# Altium PCB MB1814.PcbDoc (part 3 of 6)
Units mm, origin at the board's own origin, x right, y up, seen from the top; angles counter-clockwise.
Board outline 70 x 82.5 mm, 4 copper layers (Top Layer, Signal Layer 1, Signal Layer 2, Bottom Layer), stack 1.614 mm thick; 207 components, 155 nets, 901 pads, 710 vias.
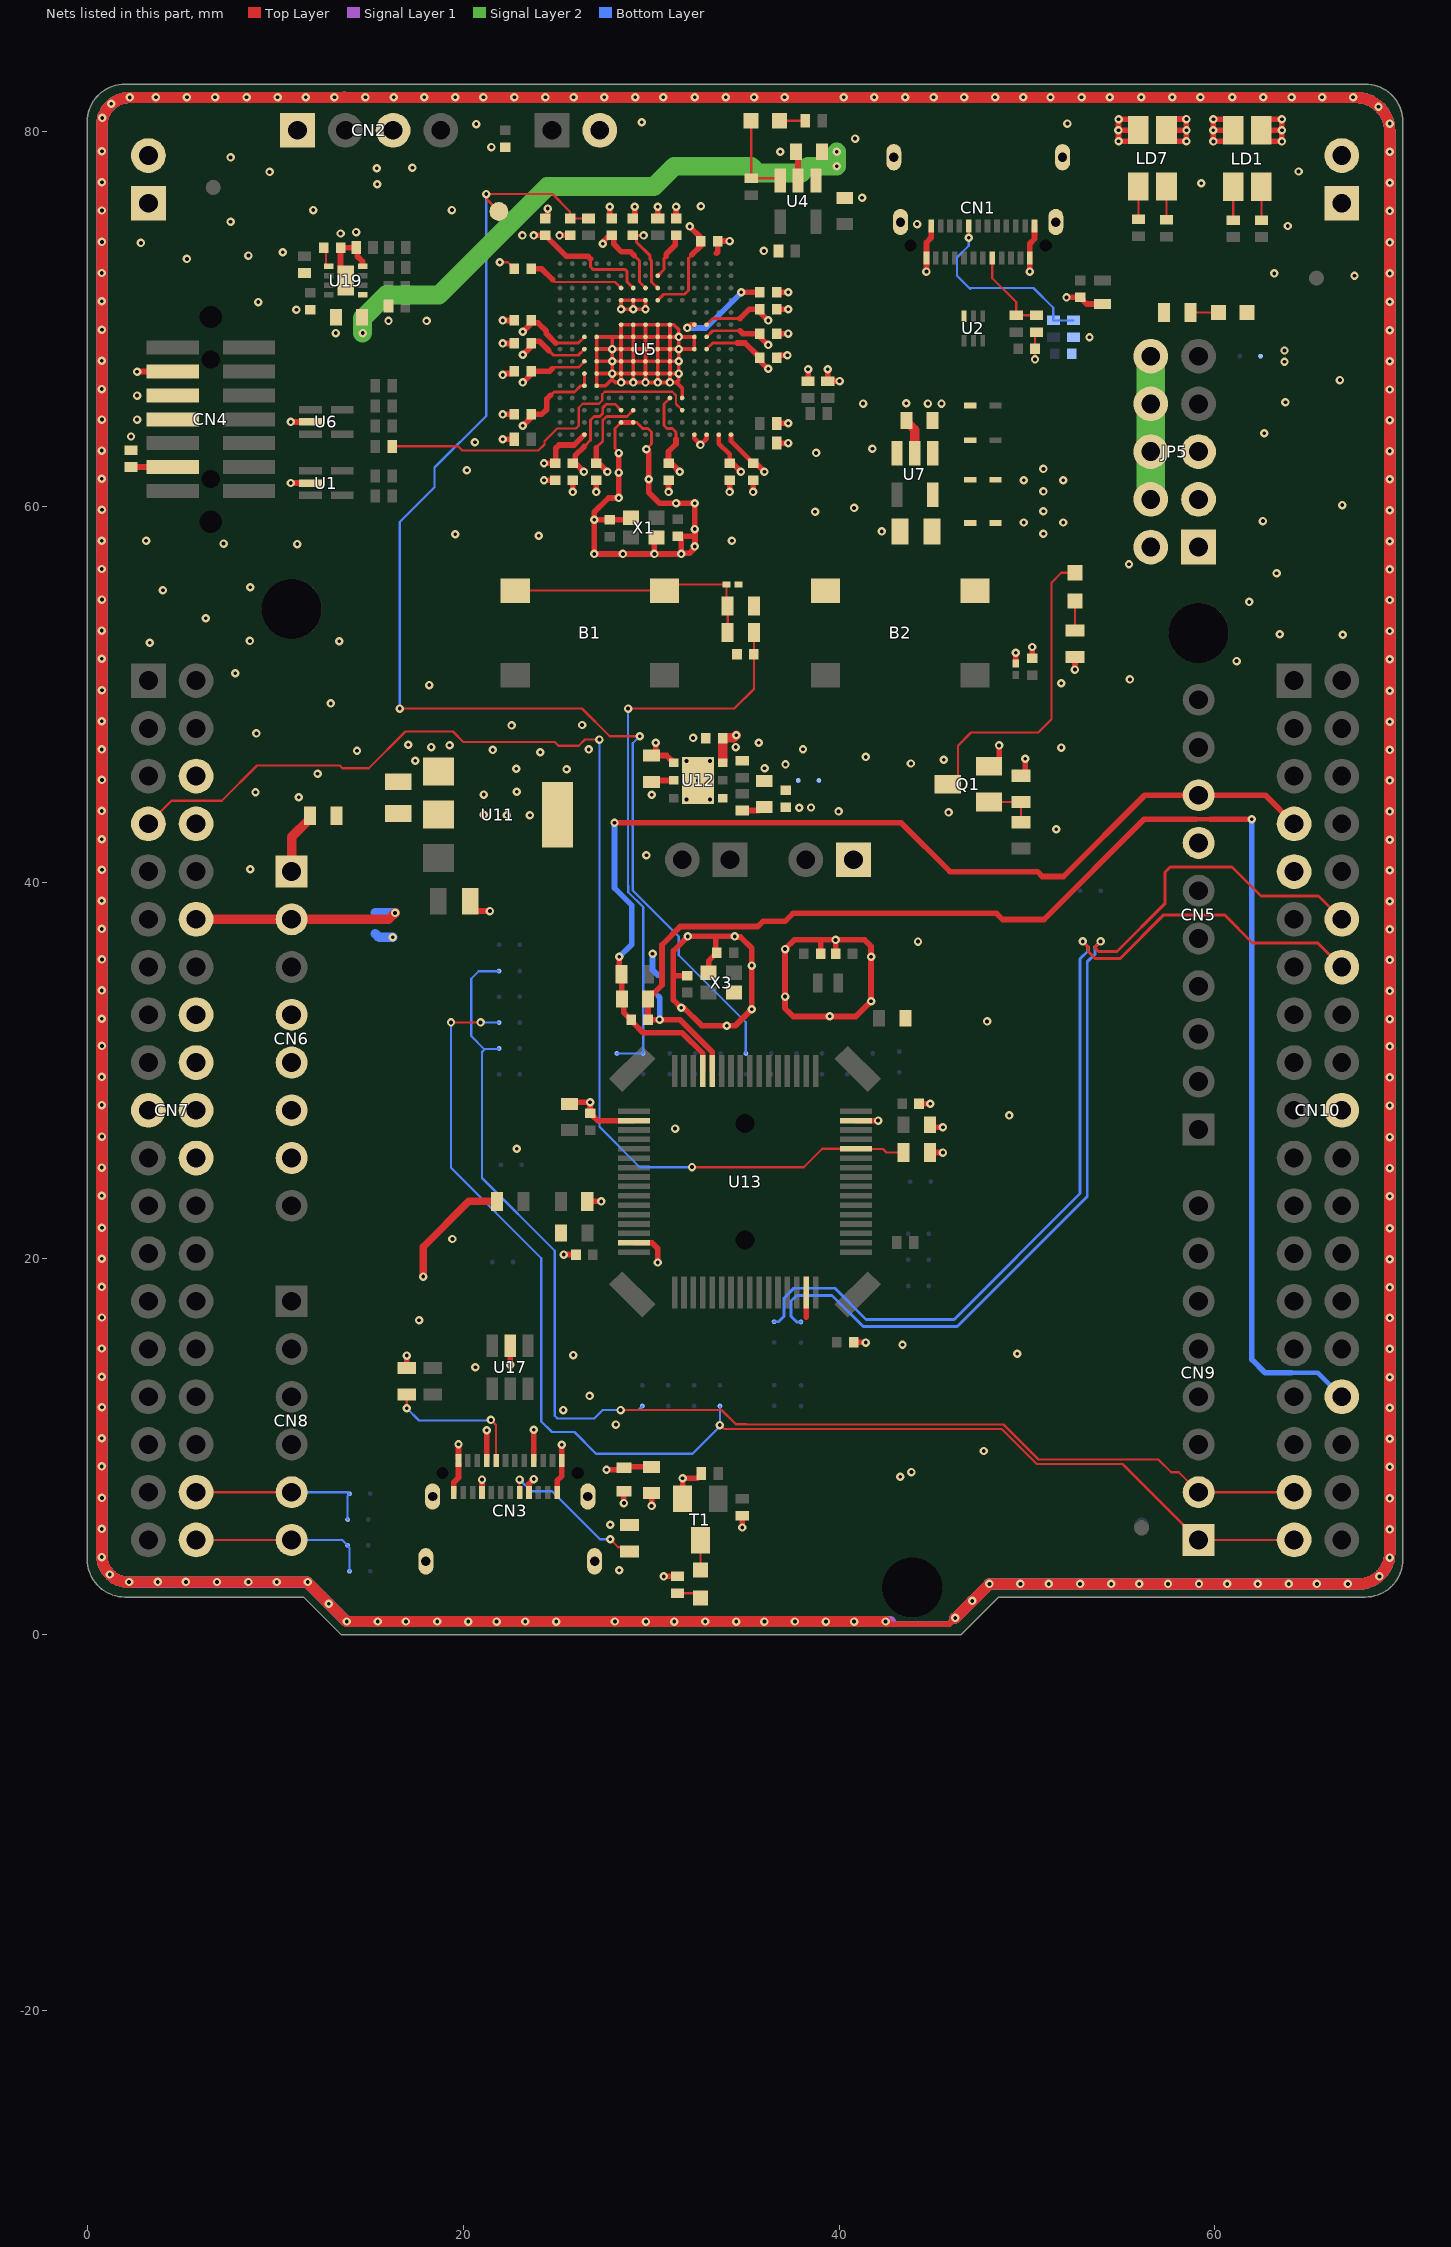
[diagram p4: the nets of this part, all layers, seen from the top]

## Part data (continued)
R2 R24: library part MCD-00062, "Resistor, 330R, 0402, +/-1%, 1/16W", Manufacturer=YAGEO, Manufacturer_Part_Number=RC0402FR-07330RL, Package=0402, Component_Country_Of_Origin=China, ComponentLink1URL=http://tunmcdsvn.tun.st.com/Component_Documentation_Library/Trunk/Resistor/YAGEO_RC_L_Series, Internal_Part_Number=MCD-00062, Order_Code_Digikey=311-330LRCT-ND, Order_Code_Farnell=9239170, Order_Code_RS=N/A, Part_Preference=Recommended, Part_Type=Resistor, Status=Released
R3 R23: library part MCD-02665, "Resistor, 1K, 0402, +/-0.1%, 1/16W, +/-25ppm/°C", Manufacturer=YAGEO, Manufacturer_Part_Number=RT0402BRD071KL, Package=0402, ComponentLink1URL=http://tunmcdsvn.tun.st.com/Component_Documentation_Library/Trunk/Resistor/YAGEO_RT_Series, Internal_Part_Number=MCD-02665, Order_Code_Digikey=YAG1386TR-ND, Order_Code_Farnell=3496475, Order_Code_RS=199-1298, Part_Preference=Recommended, Part_Type=Resistor, Status=Checked
R4 R15: library part MCD-00119, "Resistor, 100R, 0402, +/-1%, 1/16W", Manufacturer=YAGEO, Manufacturer_Part_Number=RC0402FR-07100RL, Package=0402, Component_Country_Of_Origin=China, ComponentLink1URL=http://tunmcdsvn.tun.st.com/Component_Documentation_Library/Trunk/Resistor/YAGEO_RC_L_Series, Internal_Part_Number=MCD-00119, Order_Code_Digikey=311-100LRCT-ND, Order_Code_Farnell=9239111, Order_Code_RS=N/A, Part_Preference="Not recommended", Part_Type=Resistor, Status=Checked
  R4: ID=2748, ShowFields=YES
R5: library part MCD-00185, "Resistor,3K,0402,1%,1/16W", Manufacturer=YAGEO, Manufacturer_Part_Number=RC0402FR-073KL, Package=R0402, ComponentLink1Description=Datasheet, ComponentLink1URL=http://tunmcdsvn.tun.st.com/Component_Datasheet_Library/Trunk/Resistors/Yageo_Resistor_RC0402-series, Internal_Part_Number=MCD-00185, Part_Type=Resistor, Provided_By=SUBCO, Status=Released
R6 R54: library part MCD-00059, "Resistor,100K,0402,1%,1/16W", Alternate_Manufacturer=YAGEO, Alternate_Manufacturer_Part_Number=RT0402FRE07100KL, Manufacturer_Part_Number=RC0402FR-07100KL, Package=R0402, ComponentLink1Description=Datasheet, ComponentLink1URL=http://tunmcdsvn.tun.st.com/Component_Datasheet_Library/Trunk/Resistors/Yageo_Resistor_RC0402-series, Initial_Board_Reference=MB1274, Internal_Part_Number=MCD-00059, Item Type=Item, Manufacturer=YAGEO, Part_Type=Resistor, Path=ws/MCD_ApplicationBoards/Lists/MCDPARTSdatabase, Provided_By=SUBCO, Status=Released
R7 R25: library part MCD-00225, "Resistor,510R,0603,1%,1/10W", Manufacturer=YAGEO, Manufacturer_Part_Number=RC0603FR-07510RL, Package=R0603, ComponentLink1Description=Datasheet, ComponentLink1URL=http://tunmcdsvn.tun.st.com/Component_Datasheet_Library/Trunk/Resistors/Yageo_Resistor_RC0603-series, ECCN_EU=NEC, ECCN_US=EAR99, Internal_Part_Number=MCD-00225, Part_Type=Resistor, Provided_By=SUBCO, Status=Released
R8 R10 R41: library part MCD-00053, "Resistor,10K,0402,1%,1/16W", Manufacturer=YAGEO, Manufacturer_Part_Number=RC0402FR-0710KL, Package=R0402, ComponentLink1Description=Datasheet, ComponentLink1URL=http://tunmcdsvn.tun.st.com/Component_Datasheet_Library/Trunk/Resistors/Yageo_Resistor_RC0402-series, Internal_Part_Number=MCD-00053, Part_Type=Resistor, Provided_By=SUBCO, Status=Released
  R8: Initial_Board_Reference=MB1274, Item Type=Item, Path=ws/MCD_ApplicationBoards/Lists/MCDPARTSdatabase
  R41: ECCN_EU=NEC, ECCN_US=EAR99
R9 R11 R17 R18: library part MCD-00333, "Resistor, 5K1, 0402, +/-1%, 1/16W", Alternate_Manufacturer=N/A, Manufacturer=YAGEO, Manufacturer_Part_Number=RC0402FR-075K1L, Package=0402, Alternate_Manufacturer_Part_Number=N/A, ComponentLink1URL=http://tunmcdsvn.tun.st.com/Component_Documentation_Library/Trunk/Resistor/YAGEO_RC_L_Series, Internal_Part_Number=MCD-00333, Order_Code_Digikey=311-5.10KLRCT-ND, Order_Code_Farnell=1458805, Order_Code_RS=N/A, Part_Preference=Recommended, Part_Type=Resistor, Status=Released
R12 R16 R19: library part MCD-00053, "Resistor, 10K, 0402, +/-1%, 1/16W", Manufacturer=YAGEO, Manufacturer_Part_Number=RC0402FR-0710KL, Package=0402, BMS_Part_Number=9131590, Component_Country_Of_Origin=China, ComponentLink1URL=http://tunmcdsvn.tun.st.com/Component_Documentation_Library/Trunk/Resistor/YAGEO_RC_L_Series, ID=2539, Internal_Part_Number=MCD-00053, Order_Code_Digikey=311-10.0KLRCT-ND, Order_Code_Farnell=9239359, Order_Code_RS=N/A, Part_Preference=Recommended, Part_Type=Resistor, ShowFields=YES, Status=Released
R13 R14: library part MCD-00059, "Resistor, 100K, 0402, +/-1%, 1/16W", Manufacturer=YAGEO, Manufacturer_Part_Number=RC0402FR-07100KL, Package=0402, Component_Country_Of_Origin=China, ComponentLink1URL=http://tunmcdsvn.tun.st.com/Component_Documentation_Library/Trunk/Resistor/YAGEO_RC_L_Series, ID=2533, Internal_Part_Number=MCD-00059, Order_Code_Digikey=311-100KLRTR-ND, Order_Code_Farnell=2421891, Order_Code_RS=N/A, Part_Preference=Recommended, Part_Type=Resistor, ShowFields=YES, Status=Released
R20: library part MCD-00409, "Resistor, 1K8, 0402, +/-1%, 1/16W", Manufacturer=YAGEO, Manufacturer_Part_Number=RC0402FR-071K8L, Package=0402, Component_Country_Of_Origin=China, ComponentLink1URL=http://tunmcdsvn.tun.st.com/Component_Documentation_Library/Trunk/Resistor/YAGEO_RC_L_Series, Internal_Part_Number=MCD-00409, Order_Code_Digikey=311-1.80KLRCT-ND, Order_Code_Farnell=9239260, Order_Code_RS=N/A, Part_Preference=Recommended, Part_Type=Resistor, Status=Released
R21: library part MCD-00381, "Resistor, 1K3, 0402, +/-1%, 1/16W", Manufacturer=YAGEO, Manufacturer_Part_Number=RC0402FR-071K3L, Package=0402, Component_Country_Of_Origin=China, ComponentLink1URL=http://tunmcdsvn.tun.st.com/Component_Documentation_Library/Trunk/Resistor/YAGEO_RC_L_Series, ID=2898, Internal_Part_Number=MCD-00381, Order_Code_Digikey=YAG3036CT-ND, Order_Code_Farnell=1799176, Order_Code_RS=N/A, Part_Preference=Recommended, Part_Type=Resistor, ShowFields=YES, Status=Released
R22: library part MCD-02455, "Resistor, 3K9, 0402, +/-1%, 1/16W, +/-100ppm/°C", Manufacturer=YAGEO, Manufacturer_Part_Number=RC0402FR-073K9L, Package=0402, Component_Country_Of_Origin=China, ComponentLink1URL=http://tunmcdsvn.tun.st.com/Component_Documentation_Library/Trunk/Resistor/YAGEO_RC0402_Series, ID=4561, Internal_Part_Number=MCD-02455, Order_Code_Digikey=311-3.90KLRTR-ND, Order_Code_Farnell=9239308, Order_Code_RS=198-7783, Part_Preference=Recommended, Part_Type=Resistor, ShowFields=YES, Status=Released
R26 R28: library part MCD-00223, "Resistor,100K,0603,1%,1/10W", Manufacturer=YAGEO, Manufacturer_Part_Number=RC0603FR-07100KL, Package=R0603, ComponentLink1Description=Yageo_Resistor_RC0603-series.pdf, ComponentLink1URL=http://tunmcdsvn.tun.st.com/Component_Datasheet_Library/Trunk/Resistors/Yageo_Resistor_RC0603-series, ECCN_EU=n/a, ECCN_US=n/a, Initial_Board_Reference=MB1319, Internal_Part_Number=MCD-00223, Part_Type=Resistor, Provided_By=Subcon, Status=Released
R27: library part MCD-00197, "Resistor,330R,0603,1%,1/10W", Manufacturer=YAGEO, Manufacturer_Part_Number=RC0603FR-07330RL, Package=R0603, ComponentLink1Description=Yageo_Resistor_RC0603-series.pdf, ComponentLink1URL=http://tunmcdsvn.tun.st.com/Component_Datasheet_Library/Trunk/Resistors/Yageo_Resistor_RC0603-series, ECCN_EU=n/a, ECCN_US=n/a, Internal_Part_Number=MCD-00197, Part_Type=Resistor, Provided_By=Subcon, Status=Released
R29: library part MCD-00222, "Resistor,47K,0603,1%,1/10W", Manufacturer=YAGEO, Manufacturer_Part_Number=RC0603FR-0747KL, Package=R0603, ComponentLink1Description=Datasheet, ComponentLink1URL=http://tunmcdsvn.tun.st.com/Component_Datasheet_Library/Trunk/Resistors/Yageo_Resistor_RC0603-series, ECCN_EU=NEC, ECCN_US=EAR99, Internal_Part_Number=MCD-00222, Part_Type=Resistor, Provided_By=SUBCO, Status=Released
R30: library part MCD-00070, "Resistor,1K,0603,1%,1/10W", Manufacturer=YAGEO, Manufacturer_Part_Number=RC0603FR-071KL, Package=R0603, ComponentLink1Description=Yageo_Resistor_RC0603-series.pdf, ComponentLink1URL=http://tunmcdsvn.tun.st.com/Component_Datasheet_Library/Trunk/Resistors/Yageo_Resistor_RC0603-series, ECCN_EU=n/a, ECCN_US=n/a, Initial_Board_Reference=MB1274, Internal_Part_Number=MCD-00070, Part_Type=Resistor, Provided_By=Subcon, Status=Released
R31: library part MCD-00220, "Resistor,10K,0603,1%,1/10W", Manufacturer=YAGEO, Manufacturer_Part_Number=RC0603FR-0710KL, Package=R0603, ComponentLink1Description=Yageo_Resistor_RC0603-series.pdf, ComponentLink1URL=http://tunmcdsvn.tun.st.com/Component_Datasheet_Library/Trunk/Resistors/Yageo_Resistor_RC0603-series, ECCN_EU=n/a, ECCN_US=n/a, Initial_Board_Reference=MB1319, Internal_Part_Number=MCD-00220, Part_Type=Resistor, Provided_By=Subcon, Status=Released
R32: library part MCD-00481, "Resistor,47R,0402,1%,1/16W", Manufacturer=YAGEO, Manufacturer_Part_Number=RC0402FR-0747RL, Package=R0402, ComponentLink1Description=Datasheet, ComponentLink1URL=http://tunmcdsvn.tun.st.com/Component_Datasheet_Library/Trunk/Resistors/Yageo_Resistor_RC0402-series, ECCN_EU=NEC, ECCN_US=EAR99, Internal_Part_Number=MCD-00481, Part_Type=Resistor, Provided_By=SUBCO, Status=Released
R33: library part MCD-00056, "Resistor, 0R, 0603, +/-5%, 1/10W", Alternate_Manufacturer=N/A, Manufacturer=YAGEO, Manufacturer_Part_Number=RC0603JR-070RL, Package=0603, Alternate_Manufacturer_Part_Number=N/A, ComponentLink1URL=http://tunmcdsvn.tun.st.com/Component_Documentation_Library/Trunk/Resistor/YAGEO_RC_L_Series, Internal_Part_Number=MCD-00056, Order_Code_Digikey=311-0.0GRCT-ND, Order_Code_Farnell=9233130RL, Order_Code_RS=N/A, Part_Preference=Recommended, Part_Type=Resistor, Status=Released
R34: library part MCD-00217, "Resistor, 1K5, 0603, +/-1%, 1/10W", Manufacturer=YAGEO, Manufacturer_Part_Number=RC0603FR-071K5L, Package=0603, BMS_Part_Number=9129766, Component_Country_Of_Origin=China, ComponentLink1URL=http://tunmcdsvn.tun.st.com/Component_Documentation_Library/Trunk/Resistor/YAGEO_RC_L_Series, ID=2651, Internal_Part_Number=MCD-00217, Order_Code_Digikey=311-1.50KHRCT-ND, Order_Code_Farnell=9238506, Order_Code_RS=N/A, Part_Preference=Recommended, Part_Type=Resistor, ShowFields=YES, Status=Released
R35 R43: library part MCD-00334, "Resistor, 5K1, 0603, +/-1%, 1/10W", Alternate_Manufacturer=N/A, Manufacturer=YAGEO, Manufacturer_Part_Number=RC0603FR-075K1L, Package=0603, Alternate_Manufacturer_Part_Number=N/A, ComponentLink1URL=http://tunmcdsvn.tun.st.com/Component_Documentation_Library/Trunk/Resistor/YAGEO_RC_L_Series, Internal_Part_Number=MCD-00334, Order_Code_Digikey=311-5.10KHRCT-ND, Order_Code_Farnell=1799348, Order_Code_RS=N/A, Part_Preference=Recommended, Part_Type=Resistor, Status=Released
R37: library part MCD-00480, "Resistor, 430K, 0603, +/-1%, 1/10W", Manufacturer=YAGEO, Manufacturer_Part_Number=RC0603FR-07430KL, Package=0603, Component_Country_Of_Origin=China, ComponentLink1URL=http://tunmcdsvn.tun.st.com/Component_Documentation_Library/Trunk/Resistor/YAGEO_RC_L_Series, ID=2798, Internal_Part_Number=MCD-00480, Order_Code_Digikey=311-430KHRCT-ND, Order_Code_Farnell=N/A, Order_Code_RS=N/A, Part_Preference=Recommended, Part_Type=Resistor, ShowFields=YES, Status=Released
R38: library part MCD-00441, "Resistor,270R,0402,1%,1/16W", Manufacturer=YAGEO, Manufacturer_Part_Number=RC0402FR-07270RL, Package=R0402, ComponentLink1Description=Datasheet, ComponentLink1URL=http://tunmcdsvn.tun.st.com/Component_Datasheet_Library/Trunk/Resistors/Yageo_Resistor_RC0402-series, ECCN_EU=NEC, ECCN_US=EAR99, Internal_Part_Number=MCD-00441, Part_Type=Resistor, Provided_By=SUBCO, Status=Released
R39: library part MCD-00063, "Resistor,47K,0402,1%,1/16W", Manufacturer=YAGEO, Manufacturer_Part_Number=RC0402FR-0747KL, Package=R0402, ComponentLink1Description=Datasheet, ComponentLink1URL=http://tunmcdsvn.tun.st.com/Component_Datasheet_Library/Trunk/Resistors/Yageo_Resistor_RC0402-series, ECCN_EU=NEC, ECCN_US=EAR99, Internal_Part_Number=MCD-00063, Part_Type=Resistor, Provided_By=SUBCO, Status=Released
R40: library part MCD-00506, "Resistor, 620K, 0603, +/-1%, 1/10W", Manufacturer=YAGEO, Manufacturer_Part_Number=RC0603FR-07620KL, Package=0603, Component_Country_Of_Origin=China, ComponentLink1URL=http://tunmcdsvn.tun.st.com/Component_Documentation_Library/Trunk/Resistor/YAGEO_RC_L_Series, ID=3237, Internal_Part_Number=MCD-00506, Order_Code_Digikey=311-620KHRCT-ND, Order_Code_Farnell=N/A, Order_Code_RS=N/A, Part_Preference=Recommended, Part_Type=Resistor, ShowFields=YES, Status=Released
R44 R45 R47 R49: library part MCD-00455, "Resistor, 33R, 0402, +/-1%, 1/16W", Manufacturer=YAGEO, Manufacturer_Part_Number=RC0402FR-0733RL, Package=0402, Component_Country_Of_Origin=China, ComponentLink1URL=http://tunmcdsvn.tun.st.com/Component_Documentation_Library/Trunk/Resistor/YAGEO_RC_L_Series, ID=2821, Internal_Part_Number=MCD-00455, Order_Code_Digikey=311-33.0LRCT-ND, Order_Code_Farnell=9239057, Order_Code_RS=N/A, Part_Preference=Recommended, Part_Type=Resistor, ShowFields=YES, Status=Released
R46 R48 R50: library part MCD-00052, "Resistor, 0R, 0402, +/-5%, 1/16W", Manufacturer=YAGEO, Manufacturer_Part_Number=RC0402JR-070RL, Package=0402, Component_Country_Of_Origin=China, ComponentLink1URL=http://tunmcdsvn.tun.st.com/Component_Documentation_Library/Trunk/Resistor/YAGEO_RC_L_Series, Internal_Part_Number=MCD-00052, Order_Code_Digikey=311-0.0JRCT-ND, Order_Code_Farnell=9232516RL, Order_Code_RS=618-5804, Part_Preference=Recommended, Part_Type=Resistor, Status=Released
  R46 R48: ID=2540, ShowFields=YES
R51: library part MCD-00185, "Resistor, 3K, 0402, +/-1%, 1/16W", Manufacturer=YAGEO, Manufacturer_Part_Number=RC0402FR-073KL, Package=0402, Component_Country_Of_Origin=China, ComponentLink1URL=http://tunmcdsvn.tun.st.com/Component_Documentation_Library/Trunk/Resistor/YAGEO_RC_L_Series, Internal_Part_Number=MCD-00185, Order_Code_Digikey=311-3KLRCT-ND, Order_Code_Farnell=1458777, Order_Code_RS=N/A, Part_Preference=Recommended, Part_Type=Resistor, Status=Released
R52: library part MCD-00063, "Resistor, 47K, 0402, +/-1%, 1/16W", Manufacturer=YAGEO, Manufacturer_Part_Number=RC0402FR-0747KL, Package=0402, Component_Country_Of_Origin=China, ComponentLink1URL=http://tunmcdsvn.tun.st.com/Component_Documentation_Library/Trunk/Resistor/YAGEO_RC_L_Series, ID=2528, Internal_Part_Number=MCD-00063, Order_Code_Digikey=311-47.0KLRCT-ND, Order_Code_Farnell=9239430, Order_Code_RS=N/A, Part_Preference=Recommended, Part_Type=Resistor, ShowFields=YES, Status=Released
R53: library part MCD-01943, "Resistor, 15K, 0402, +/-1%, 1/16W", Manufacturer=YAGEO, Manufacturer_Part_Number=RC0402FR-0715KL, Package=0402, Component_Country_Of_Origin=China, ComponentLink1URL=http://tunmcdsvn.tun.st.com/Component_Documentation_Library/Trunk/Resistor/YAGEO_RC_L_Series, ID=4043, Internal_Part_Number=MCD-01943, Order_Code_Digikey=311-15.0KLRCT-ND, Order_Code_Farnell=2146237, Order_Code_RS=618-6009, Part_Preference=Recommended, Part_Type=Resistor, ShowFields=YES, Status=Released
SB1 SB2 SB3 SB5 SB6 SB7 SB9 SB11 SB12 SB13 SB15 SB16 SB17 SB18 SB19 SB20 SB21 SB22 SB23 SB24 SB25 SB26 SB27 SB28 SB29 SB30 SB31 SB32 SB33 SB34 SB35 SB36 SB37 SB38 SB39 SB40 SB41 SB42 SB43 SB44 SB45: library part MCD-00071, "Solder Bridge ON", Manufacturer=YAGEO, Manufacturer_Part_Number=RC0603JR-070RL, Package=SB0603, ComponentLink1Description=Datasheet, ComponentLink1URL=http://tunmcdsvn.tun.st.com/Component_Datasheet_Library/Trunk/Resistors/Yageo_Resistor_RC0603-series, ECCN_EU=n/a, ECCN_US=n/a, Internal_Part_Number=MCD-00071, Part_Type=Mechanical, Provided_By=SUBCO, Status=Released
T1: library part MCD-00073, "NPN Bipolar Transistor", Alternate_Manufacturer="ON SEMICONDUCTOR", Alternate_Manufacturer_Part_Number="MMBT2222ALT1G / MMBT2222ALT3G", Manufacturer_Part_Number=BSR14, ComponentLink1Description=Datasheet, ComponentLink1URL=http://tunmcdsvn.tun.st.com/Component_Datasheet_Library/Trunk/IC/NXP_Transistor_BSR14, ECCN_EU=NEC, ECCN_US=EAR99, Internal_Part_Number=MCD-00073, Manufacturer="ON SEMICONDUCTOR", Part_Type=IC, Provided_By=SUBCO, Status=Released
TP13: library part MCD-00074, "Test Point 1mm", Manufacturer=n/a, ComponentLink1Description=Datasheet, ComponentLink1URL=http://na, Internal_Part_Number=MCD-00074, Manufacturer_Part_Number=n/a, Part_Type=Mechanical, Provided_By=n/a, Status=Released
U1 U6: library part MCD-00136, "Dual Transil array for ESD protection", Manufacturer=STMICROELECTRONICS, Manufacturer_HQ_COO=EU, BMS_Part_Number=9151112, Component_Country_Of_Origin=China, ComponentLink1URL=http://tunmcdsvn.tun.st.com/Component_Datasheet_Library/Trunk/Diodes/STM_ESD_ESDALC6V1W5, Internal_Part_Number=MCD-00136, Manufacturer_Part_Number=ESDALC6V1W5, Part_Preference=Recommended, Part_Type=Diode, Status=Released
U2: library part MCD-00649, "Common mode filter with ESD protection for USB 2.0 interface", Manufacturer=STMICROELECTRONICS, Manufacturer_HQ_COO=EU, BMS_Part_Number=9151138, Component_Country_Of_Origin=China, ComponentLink1URL=http://tunmcdsvn.tun.st.com/Component_Datasheet_Library/Trunk/Diodes/STM_ESD_ECMF02-2AMX6, ID=3094, Internal_Part_Number=MCD-00649, Manufacturer_Part_Number=ECMF02-2AMX6, Part_Preference=Recommended, Part_Type=Diode, ShowFields=YES, Status=Released
U3: library part MCD-01207, "High power Transient voltage suppressor:25V/35A EOS and ESD transients protection.", Manufacturer=STMICROELECTRONICS, Manufacturer_Part_Number=ESDA25P35-1U1M, Package=QFN1610, BMS_Part_Number=9179045, ComponentLink1Description=Datasheet, ComponentLink1URL=http://tunmcdsvn.tun.st.com/Component_Datasheet_Library/Trunk/Diodes/STM_ESD_ESDA25P35-1U1M, ECCN_EU=NEC, ECCN_US=EAR99, Internal_Part_Number=MCD-01207, Part_Type=Diode, Provided_By="SUBCO with ST control", Status=Checked
U4: library part MCD-00159, "500mA, Enhanced single channel power switches with active high enable pin", Alternate_Manufacturer="TEXAS INSTRUMENTS", Alternate_Manufacturer_Part_Number=TPS2051C, Manufacturer=STMICROELECTRONICS, BMS_Part_Number=9159009, ComponentLink1Description=Datasheet, ComponentLink1URL=http://tunmcdsvn.tun.st.com/Component_Datasheet_Library/Trunk/IC/STM_PWR-Switch_STMPS2151STR, Initial_Board_Reference=MB1264, Internal_Part_Number=MCD-00159, Manufacturer_Part_Number=STMPS2151STR, Part_Type=IC, Provided_By=Subcon, Status=Checked
U5: library part MCD-02706, "STM32F723IEK  (STM32F7) BGA176", Manufacturer=STMICROELECTRONICS, Manufacturer_Part_Number=STM32F723IEK6, Package=BGA176, BMS_Part_Number=9175300, ComponentLink1URL=http://tunmcdsvn.tun.st.com/Component_Datasheet_Library/Trunk/IC/BGA176+25L_10x10x0.6_pitch0.65, ID=4812, Internal_Part_Number=MCD-02706, Order_Code_Digikey=497-17186-ND, Order_Code_Farnell=2725149, Order_Code_RS=135-8241, Part_Preference=Recommended, Part_Type=IC, ShowFields=YES, Status=New
U7: library part MCD-02514, "LDO, 3.3V, 300mA, High input voltage: 2.5V to 28V, SOT23-5L", Alternate_Manufacturer=N/A, Manufacturer=STMICROELECTRONICS, Package=SOT23-5L, Alternate_Manufacturer_Part_Number=N/A, BMS_Part_Number=N/A, ComponentLink1URL=http://tunmcdsvn.tun.st.com/Component_Documentation_Library/Trunk/IC/STMICROELECTRONICS_ST730M33R, Internal_Part_Number=MCD-02514, Manufacturer_Part_Number=ST730M33R, Order_Code_Digikey=N/A, Order_Code_Farnell=N/A, Order_Code_RS=N/A, Part_Preference=Recommended, Part_Type=IC, Status=New
U9 U10: library part MCD-00170, "ESD protection 6V1", Manufacturer=STMICROELECTRONICS, Manufacturer_Part_Number=ESDALC6V1-1U2, ComponentLink1Description=STM_ESD_ESDALC6V1-1U2.pdf, ComponentLink1URL=http://tunmcdsvn.tun.st.com/Component_Datasheet_Library/Trunk/Diodes/STM_ESD_ESDALC6V1-1U2, ECCN_EU=NEC, ECCN_US=EAR99, Initial_Board_Reference=MB1274, Internal_Part_Number=MCD-00170, Part_Type=Diode, Provided_By=Subcon, Status=Released
U11: library part MCD-00088, "IC REG LDO 5V 0.8A SOT223", Manufacturer=STMICROELECTRONICS, Manufacturer_Part_Number=LD1117S50TR, Package=SOT-223, BMS_Part_Number=9176133, ComponentLink1Description=Datasheet, ComponentLink1URL=http://tunmcdsvn.tun.st.com/Component_Datasheet_Library/Trunk/IC/STM_LDO_LD1117, ECCN_EU=NEC, ECCN_US=EAR99, Internal_Part_Number=MCD-00088, Part_Type=IC, Provided_By="SUBCO with ST control", Status=Released
U12: library part MCD-03339, "LDO, 1V5 to 5V5V, 1A adjustable", Manufacturer=STMICROELECTRONICS, Package="DFN6 3x3mm", Component_Country_Of_Origin=Malaysia, ComponentLink1URL=http://tunmcdsvn.tun.st.com/Component_Documentation_Library/Trunk/IC/STMICROELECTRONICS_LD39100PUR, ID=5455, Internal_Part_Number=MCD-03339, Manufacturer_Part_Number=LD39100PUR, Order_Code_Digikey=N/A, Order_Code_Farnell=N/A, Order_Code_RS=N/A, Part_Preference=Recommended, Part_Type=IC, ShowFields=YES, Status=Released
U13: library part MCD-02438, "MCU, Arm Cortex-M33, 250MHz, 32-bit MCU, 128KB flash, 32KB SRAM", Manufacturer=STMICROELECTRONICS, Manufacturer_Part_Number=STM32H503RBT6, Package=LQFP64, ComponentLink1URL=http://tunmcdsvn.tun.st.com/Component_Documentation_Library/Trunk/IC/STMICROELECTRONICS_STM32H503RBH6, ID=4544, Internal_Part_Number=MCD-02438, Order_Code_Digikey=N/A, Order_Code_Farnell=N/A, Order_Code_RS=N/A, Part_Preference=Recommended, Part_Type=IC, ShowFields=YES, Status=New
U14: library part MCD-00251, "High power transient voltage suppressor, 7V breakdown", Manufacturer=STMICROELECTRONICS, Manufacturer_HQ_COO=EU, Manufacturer_Part_Number=ESDA7P60-1U1M, BMS_Part_Number=9179042, ComponentLink1URL=http://tunmcdsvn.tun.st.com/Component_Datasheet_Library/Trunk/Diodes/STM_ESD_ESDA7P60-1U1M, Internal_Part_Number=MCD-00251, Part_Preference=Recommended, Part_Type=Diode, Status=Released
U17: library part MCD-00163, "Very low capacitance ESD protection", Manufacturer=STMICROELECTRONICS, BMS_Part_Number=9151075, ComponentLink1Description=Datasheet, ComponentLink1URL=http://tunmcdsvn.tun.st.com/Component_Datasheet_Library/Trunk/Diodes/STM_ESD_USBLC6-2, ECCN_EU=NEC, ECCN_US=EAR99, Internal_Part_Number=MCD-00163, Manufacturer_Part_Number=USBLC6-2SC6, Part_Type=IC, Provided_By="SUBCO with ST control", Status=Released
U19: library part MCD-02532, "eFuse with Fast Overvoltage Protection 2.7V to 18V 4A 34mOhm 8-Pin WSON", Manufacturer="TEXAS INSTRUMENTS", Package=WSON8, ComponentLink1URL=http://tunmcdsvn.tun.st.com/Component_Datasheet_Library/Trunk/IC/TI_eFuse_tps2595/TI_eFuse_tps2595.pdf, Internal_Part_Number=MCD-02532, Manufacturer_Part_Number=TPS259535DSG, Order_Code_Digikey=N/A, Order_Code_Farnell=NA, Order_Code_RS=NA, Part_Preference=Recommended, Part_Type=IC, Status=New
X1: library part MCD-01036, "Crystal, 24MHz, 6pF, +/-20ppm, 80R, 2x1.6mm", Manufacturer=NDK, Manufacturer_Part_Number=NX2016SA-24MHZ-EXS00A-CS10820, Package=2x1.6mm, BMS_Part_Number=9157045, Component_Country_Of_Origin=Unknown, ComponentLink1URL=http://tunmcdsvn.tun.st.com/Component_Documentation_Library/Trunk/Crytal_Oscillator/NDK_NX2016SA_Series, Internal_Part_Number=MCD-01036, Order_Code_Digikey=644-1365, Order_Code_Farnell=N/A, Order_Code_RS=N/A, Part_Preference=Recommended, Part_Type=Crystal_Osc, Status=Released
X2: library part MCD-02291, "Crystal, 32.768kHz, 9pF, +/-20ppm, 70KR, 1.6x1mm", Manufacturer=NDK, Manufacturer_Part_Number=NX1610SE-32.768KHZ-EXS00A-MU01499, Package=1.6x1mm, Component_Country_Of_Origin=Unknown, ComponentLink1URL="http://tunmcdsvn.tun.st.com/Component_Datasheet_Library/Trunk/Crystal_Osc/NDK_NX1610SE 32.768KHz EXS00A-MU01499", ID=4391, Internal_Part_Number=MCD-02291, Order_Code_Digikey=N/A, Order_Code_Farnell=N/A, Order_Code_RS=N/A, Part_Preference=Recommended, Part_Type=Crystal_Osc, ShowFields=YES, Status=Released
X3: library part MCD-01036, "Crystal 24MHz, 6pF, +-20ppm, 80ohms max, SMD", Manufacturer=NDK, Manufacturer_Part_Number="NX2016SA 24MHz EXS00A-CS10820", Package="(2016) 2.0 x 1.6 x 0.45 mm", BMS_Part_Number=9157045, ComponentLink1Description=Datasheet, ComponentLink1URL="http://tunmcdsvn.tun.st.com/Component_Datasheet_Library/Trunk/Crystal_Osc/NDK_NX2016SA 24MHz EXS00A-CS10820 (EXS10B-27366B)", ECCN_EU=NEC, ECCN_US=EAR99, Internal_Part_Number=MCD-01036, Order_Code_Digikey=644-1365, Part_Type=Crystal_Osc, Provided_By=SUBCO, Status=Released

## Free pads (board coordinates)
  round 3.2 hole 3.2 unplated: 0(10.87,54.57) 0(43.89,2.5) 0(59.13,53.3)
  round 0.508 on Mech16: 1(11.398,-28.906) 1(60.246,-28.906)

## Via types
v1: diameter 0.45, hole 0.2, Top Layer to Bottom Layer, tented both sides, 696 vias
v2: diameter 0.45, hole 0.2, Top Layer to Bottom Layer, 14 vias

## Nets (pads, with @x,y where several pads share a name; then routed paths per layer and width w, separated by ;. In a path a pad name is that pad's centre, name@x,y a point inside that pad or via, vN(x,y) a via of type N, cw(c..) or ccw(c..) an arc to the next point about the centre after c; other vN are vias at no path point)
3V3: CN4.3 CN6.4 CN7.16 JP6.1 R19.2 R25.1 R38.2 SB5.2 SB39.1 | length 4.9
  Top Layer w0.3: v1(2.65,67.2) 2.655,67.205 CN4.3@4.538,67.205 ; v1(30.675,3.1) R38.2@31.4,3.1 ; R19.2@36.675,63.4 v1(37.3,63.4) ; v1(52.55,51.35) R25.1@52.55,52.025
  Bottom Layer w0.5: SB39.1@15.325,37.3 15.525,37.1 v1(16.25,37.1)
3V3_STLK: C6.1 C7.1 C8.1 C9.1 C13.1 C14.1 C15.1 C16.1 C17.1 C18.1 C21.1 C22.1 C23.1 C24.1 C25.1 C26.1 C27.1 C31.2 CN2.1 LD1.4 LD7.4 R10.2 U5.C1 U5.C5 U5.C6 U5.C7 U5.C8 U5.C9 U5.F3 U5.G3 U5.G13 U5.H13 U5.J12 U5.J13 U5.K4 U5.N8 U5.N9 U5.N10 U5.P1 U5.R1 U7.1 | length 84.2
  Top Layer w0.15: 24.55,68.325 24.805,68.07 26.12,68.07 U5.C8@26.45,68.4 ; 24.65,65.95 24.825,66.125 25.928,66.125 26.253,66.45 U5.C5@26.45,66.45 ; 24.725,67.35 24.805,67.43 26.13,67.43 U5.C7@26.45,67.75 ; 24.92,68.721 25.046,68.721 25.05,68.725 26.125,68.725 U5.C9@26.45,69.05 ; 26.45,63.225 26.78,63.555 26.78,64.633 26.967,64.82 27.269,64.82 27.425,64.976 27.425,65.278 27.617,65.47 28.08,65.47 U5.F3@28.4,65.15 ; 27.075,63.15 27.43,63.505 27.43,64.633 27.617,64.82 28.72,64.82 U5.G3@29.05,65.15 ; U5.J12@30.35,71 30.67,71.32 31.773,71.32 31.98,71.527 31.98,73.23 32.175,73.425 ; U5.K4@31,65.8 30.68,65.48 30.68,64.338 30.848,64.17 31.133,64.17 31.325,63.978 31.325,63.6 ; U5.N8@32.95,68.4 33.275,68.725 34.575,68.725 ; U5.N9@32.95,69.05 33.275,69.375 34.725,69.375 ; U5.N10@32.95,69.7 33.275,70.025 34.725,70.025
  Top Layer w0.16: U5.C5@26.45,66.45 U5.C6@26.45,67.1 ; 26.775,73.2 26.775,73.085 26.775,72.775 26.925,72.625 28.5,72.625 ; 28.535,72.625 28.625,72.625 28.725,72.525 28.725,72.165 28.725,71.975 U5.G13@29.05,71.65 ; C8.1@29.025,74.45 C8.1@29.044,74.45 ; 29.1,73.375 29.375,73.1 29.375,71.975 U5.H13@29.7,71.65 ; v1(29.6,74.45) C8.1@29.044,74.45 ; U5.J13@30.35,71.65 30.025,71.975 30.025,73.1 29.947,73.178 29.947,73.363 29.219,74.09 29.219,74.275 C8.1@29.044,74.45
  Top Layer w0.25: U5.P1@33.6,63.85 33.6,63.375 34.175,62.8 C26.1@34.175,62.325 ; U5.R1@34.25,63.85 34.25,63.5 C27.1@35.425,62.325
  Top Layer w0.3: v1(22.1,63.6) R10.2@22.725,63.6 ; v1(23.175,64.325) 23.625,64.775 C21.1@23.625,64.925 24.175,64.925 24.45,65.2 24.45,65.75 24.65,65.95 ; v1(23.175,66.625) 23.625,67.075 C17.1@23.625,67.225 24.6,67.225 24.725,67.35 ; v1(23.175,68.1) 23.625,68.55 C15.1@23.625,68.7 ; v1(23.175,69.325) 23.625,69.775 C13.1@23.625,69.9 ; C15.1@23.625,68.825 24.05,68.825 24.55,68.325 ; C13.1@23.625,69.925 C13.1@23.625,69.9 ; v1(23.75,74.45) C6.1@24.375,74.45 24.4,74.45 24.505,74.345 24.505,74.32 25.475,73.35 26.625,73.35 26.775,73.2 ; v1(24.3,62.325) C24.1@24.9,62.325 24.925,62.35 24.925,63.124 25.101,63.3 25.9,63.3 U5.C1@26.45,63.85 ; 24.92,68.721 24.425,69.216 24.425,69.35 23.98,69.795 23.73,69.795 C13.1@23.625,69.9 ; C22.1@25.825,62.325 C22.1@25.85,62.325 ; v1(26.425,61.875) 25.975,62.325 C22.1@25.85,62.325 ; 26.45,63.225 25.955,62.73 25.955,62.43 C22.1@25.85,62.325 ; 27.075,63.15 C23.1@27.075,62.325 27.225,62.325 v1(27.675,61.875) ; v1(27.425,74) 27.454,74.029 27.454,74.123 27.676,74.345 27.795,74.345 C7.1@27.9,74.45 27.906,74.45 28.011,74.345 28.011,73.989 28.425,73.575 28.9,73.575 29.1,73.375 ; 31.325,63.6 31.325,63.35 30.925,62.95 C25.1@30.925,62.325 31.075,62.325 v1(31.525,61.875) ; v1(32.05,74.925) 32.65,74.325 C9.1@32.65,74.15 32.65,73.9 32.175,73.425 ; C26.1@34.175,62.325 34.325,62.325 v1(34.775,61.875) ; 34.575,68.725 35,68.725 35.645,68.08 35.67,68.08 35.775,67.975 C18.1@35.775,67.95 35.775,67.8 v1(36.225,67.35) ; 34.725,69.375 34.875,69.225 C16.1@35.775,69.225 35.775,69.075 v1(36.225,68.625) ; 34.725,70.025 35.225,70.525 C14.1@35.775,70.525 35.775,70.375 v1(36.225,69.925) ; C27.1@35.425,62.325 35.575,62.325 v1(36.025,61.875) ; v1(54.865,80.05) v1@54.87,80.05 ; LD7.4@55.925,80.05 v1@54.87,80.05 ; LD7.4@55.93,79.46 v1(54.87,79.46) v1@54.87,80.05 ; LD7.4@55.93,80.635 v1(54.87,80.635) v1@54.87,80.05 ; v1(59.91,80.04) v1@59.915,80.04 ; LD1.4@60.97,80.04 v1@59.915,80.04 ; LD1.4@60.975,79.45 v1(59.915,79.45) v1@59.915,80.04 ; LD1.4@60.975,80.625 v1(59.915,80.625) v1@59.915,80.04
  other v1: 44.725,65.5 45.45,65.5 23.15,74.45
5V: C36.2 C37.2 CN6.5 CN7.18 JP5.2 JP5.4 JP5.6 JP5.8 JP5.10 R7.2 R11.2 U12.1 U12.6 | length 30.5
  Top Layer w0.3: C37.2@30.025,46.775 C37.2@30.08,46.775 ; v1(30.25,47.45) 30.25,46.945 C37.2@30.08,46.775 ; U12.1@31.2,46.4 31.175,46.4 31.1,46.475 31.1,46.5 30.825,46.775 C37.2@30.08,46.775 ; v1(39.4,67.325) R11.2@39.4,66.7 v1(40.025,66.7)
  Top Layer w0.5: U12.6@33.8,46.475 C36.2@33.8,47.7 33.8,47.725 33.805,47.73 34.405,47.73 v1(34.525,47.85)
  Signal Layer 2 w0.3: JP5.4@56.42,60.24 JP5.4@56.585,60.405
  Signal Layer 2 w1.5: JP5.4@56.585,60.405 JP5.6@56.585,62.945 ; JP5.6@56.585,62.175 JP5.6@56.585,62.945 ; JP5.6@56.585,62.175 JP5.8@56.585,64.715 ; JP5.6@56.585,62.175 JP5.8@56.585,64.715 ; JP5.6@56.585,62.945 JP5.8@56.585,64.715 ; JP5.6@56.585,62.945 JP5.8@56.585,64.715 ; JP5.6@56.585,62.945 JP5.8@56.585,64.715 ; JP5.6@56.585,62.945 JP5.8@56.585,64.715 ; JP5.6@56.585,62.945 JP5.8@56.585,64.715 ; JP5.8@56.585,64.715 JP5.10@56.585,67.255 ; JP5.10@56.585,67.255 JP5.8@56.585,65.485 JP5.10@56.585,67.255 ; JP5.10@56.585,67.255 JP5.10@56.585,68.025 JP5.10@56.585,67.255
  other v1: 34.5,47.225
5V_STLK: C5.2 C28.2 JP5.1 U4.1 U19.5 | length 30.4
  Signal Layer 2 w1: v1(14.65,69.25) 14.65,70.05 15.875,71.275 18.7,71.275 24.475,77.05 30.15,77.05 31.225,78.125 35.325,78.125 35.68,77.77 37.995,77.77 38.35,78.125 v1(39.875,78.125) v1(39.875,78.9)
5V_VIN: C38.2 D2.1 JP5.3 R30.2 U11.2 U11.4
  other v1: 22.325,43.6 23.55,43.6 21.1,43.615 21.1,44.7 22.85,44.85 25.5,46.05 22.825,46.075 24.1,46.95 21.575,47.075 26.675,47.1 50.875,58.575 49.82,59.175 51.93,59.175 50.875,59.775
AGND: C43.1 C44.1 CN10.32 SB11.2 U13.12 | length 79.6
  Top Layer w0.25: 58.971,43.389 59.739,43.389
  Top Layer w0.3: U13.12@33.25,30 33.25,31.009 31.544,32.715 30.45,32.715 C44.1@29.835,32.715 29.835,33.82 C43.1@29.84,33.825 29.84,33.95 30.01,34.12 30.135,34.12 30.575,34.56 30.575,36.7 31.55,37.675 35.675,37.675 35.95,37.95 37.125,37.95 37.55,38.375 48.375,38.375 48.7,38.05 50.9,38.05 56.239,43.389 58.971,43.389 ; 59.739,43.389 v1(61.961,43.389)
  Bottom Layer w0.25: 64.051,13.935 65.475,13.935 CN10.32@66.75,12.66
  Bottom Layer w0.3: SB11.2@30.375,33.975 30.45,33.9 v1(30.45,32.725) ; v1(61.961,43.389) 61.961,14.639 62.665,13.935 64.051,13.935
ARD_D0_RX: CN9.1 CN10.37 SB18.2 SB33.1 | length 70.8
  Top Layer w0.12: v1(19.35,32.575) v1(20.925,32.575) ; v1(33.65,11.15) 33.685,11.15 33.89,10.945 48.655,10.945 50.515,9.085 55.085,9.085 CN9.1@59.13,5.04 CN10.37@64.21,5.04
  Bottom Layer w0.12: v1(19.35,32.575) 19.35,24.836 24.155,20.031 24.155,11.345 24.72,10.78 25.916,10.78 27.071,9.625 32.2,9.625 33.65,11.075 v1(33.65,11.15) ; v1(20.925,32.575) 20.935,32.565 SB18.2@21.91,32.565 ; v1@33.66,11.15 SB33.1@33.66,12.165
ARD_D1_TX: CN9.2 CN10.35 SB7.2 SB19.1 SB22.2 | length 70.5
  Top Layer w0.12: v1(28.375,11.95) 33.75,11.95 34.51,11.19 35.066,11.19 35.071,11.185 48.754,11.185 50.614,9.325 56.986,9.325 57.676,8.635 58.075,8.635 CN9.2@59.13,7.58 CN10.35@64.21,7.58
  Bottom Layer w0.12: 21.125,31.15 20.425,31.85 20.425,34.9 20.825,35.3 SB7.2@21.9,35.3 ; 21.15,31.15 21,31 ; SB22.2@21.91,31.19 21.884,31.164 21.15,31.164 21,31.014 21,31 ; SB19.1@29.535,12.165 29.32,11.95 v1(28.375,11.95) 27.425,11.95 26.975,11.5 25.018,11.5 24.875,11.643 24.875,20.425 21,24.3 21,31
AVDD: C43.2 C44.2 CN5.8 CN10.7 R33.2 U13.13 | length 56.5
  Top Layer w0.3: v1(28.05,43.2) 43.3,43.2 45.9,40.6 50.55,40.6 50.813,40.338 51.938,40.338 56.264,44.664 CN5.8@59.13,44.664 62.686,44.664 CN10.7@64.21,43.14 ; v1(28.3,36.075) 28.3,35.305 28.45,35.155 R33.2@28.435,35.14 28.44,35.135 C43.2@28.44,33.825 28.533,33.732 28.533,33.117 28.805,32.845 28.83,32.845 28.935,32.74 C44.2@28.935,32.715 ; C44.2@29.04,32.568 29.583,32.025 31.64,32.025 32.75,30.915 U13.13@32.75,30
  Bottom Layer w0.3: v1(28.05,43.2) 28.05,39.725 28.959,38.816 28.959,36.709 28.325,36.075 v1(28.3,36.075)
B_USER: C35.2 R27.2 SB16.1 SB21.1 | length 30.2
  Top Layer w0.12: v1(28.775,49.275) 34.425,49.275 35.47,50.32 C35.2@35.47,52.165 R27.2@35.47,53.315
  Bottom Layer w0.12: SB16.1@28.175,30.925 SB21.1@29.575,30.925 29.575,38.711 28.785,39.501 28.785,39.84 28.775,39.85 v1(28.775,49.275)
BOOT0: CN7.7 R31.2 U13.60 | length 64.8
  Top Layer w0.12: CN7.7@3.25,43.14 4.485,44.375 7.15,44.375 9.025,46.25 13.425,46.25 13.575,46.1 14.975,46.1 16.925,48.05 19.456,48.05 20.009,47.497 24.878,47.497 25.075,47.3 26.15,47.3 26.475,47.625 v1(27.25,47.625) ; v1(32.175,24.875) 38.125,24.875 39.1,25.85 U13.60@40.9,25.85 40.91,25.84 42.335,25.84 42.525,25.65 R31.2@43.425,25.65
  Bottom Layer w0.12: v1(27.25,47.625) 27.25,27.025 29.4,24.875 v1(32.175,24.875)
E5V: CN7.6 D4.1 JP5.5
  other v1: 50.875,60.825 49.82,61.425 51.93,61.425 50.875,62.025
GND: B2.3 B2.4 C1.1 C2.2 C3.2 C4.1 C5.1 C6.2 C7.2 C8.2 C9.2 C10.1 C11.1 C12.1 C13.2 C14.2 C15.2 C16.2 C17.2 C18.2 C19.1 C20.2 C21.2 C22.2 C23.2 C24.2 C25.2 C26.2 C27.2 C28.1 C29.1 C30.1 C31.1 C32.1 C33.1 C34.1 C35.1 C36.1 C37.1 C38.1 C39.1 C40.1 C41.1 C42.1 C45.1 C46.1 C47.1 C48.1 C49.1 C52.1 C53.1 C54.1 C55.1 C56.1 C57.1 C58.1 C59.1 CN1.A1 CN1.A12 CN1.B1 CN1.B12 CN1.SH1 CN1.SH2 CN1.SH3 CN1.SH4 CN2.3 CN3.A1 CN3.A12 CN3.B1 CN3.B12 CN3.SH1 CN3.SH2 CN3.SH3 CN3.SH4 CN4.5 CN4.7 CN5.7 CN6.6 CN6.7 CN7.8 CN7.19 CN7.20 CN7.22 CN10.9 CN10.20 CN11.1 CN11.2 CN12.1 CN12.2 JP1.2 LD1.3 LD3.2 LD7.3 Q1.2 R5.2 R8.1 R9.2 R12.2 R15.1 R16.2 R17.2 R18.1 R22.2 R26.1 R28.1 R31.1 R35.1 R40.1 R41.1 R43.1 R53.1 R54.1 SB11.1 T1.2 U1.2 U2.3 U3.2 U4.2 U5.D5 U5.D6 U5.D7 U5.D8 U5.D9 U5.F2 U5.F6 U5.F7 U5.F8 U5.F9 U5.F10 U5.F12 U5.G2 U5.G6 U5.G7 U5.G8 U5.G9 U5.G10 U5.G12 U5.H6 U5.H7 U5.H8 U5.H9 U5.H10 U5.H12 U5.J6 U5.J7 U5.J8 U5.J9 U5.J10 U5.K6 U5.K7 U5.K8 U5.K9 U5.K10 U5.L4 U5.M1 U5.M8 U5.M9 U5.N1 U6.2 U7.2 U9.2 U10.2 U11.1 U12.2 U12.EP U13.18 U13.31 U13.47 U13.63 U14.2 U17.2 U19.8 U19.9 X1.2 X1.4 X3.2 X3.4 | length 1372.1
  Top Layer w0.12: v1(21.95,73.025) 22.375,73.025 22.505,72.895 22.53,72.895 22.725,72.7 C10.1@22.725,72.675 ; v1(50.425,67.85) 50.425,69.225 R9.2@50.5,69.3
  Top Layer w0.15: v1(28.28,62.87) 28.28,62.903 28.075,63.108 28.075,64.175 U5.F2@28.4,64.5 ; U5.G2@29.05,64.5 29.06,64.49 29.235,64.49 29.555,64.17 29.833,64.17 30.02,63.983 30.02,63.345 v1(29.75,63.075)
  Top Layer w0.2: U5.L4@31.65,65.8 31.65,66.325 31.35,66.625 ; U5.D6@27.1,67.1 v1(27.925,67.1) ; U5.D6@27.1,67.1 U5.D5@27.1,66.45 27.575,66.45 27.925,66.8 ; U5.D6@27.1,67.1 U5.D7@27.1,67.75 ; U5.D7@27.1,67.75 U5.D8@27.1,68.4 ; U5.D7@27.1,67.75 v1(27.925,67.75) ; U5.D8@27.1,68.4 U5.D9@27.1,69.05 27.925,69.05 ; U5.D8@27.1,68.4 v1(27.925,68.4) ; 27.925,66.8 28.1,66.625 v1(28.4,66.625) ; 27.925,66.8 v1(27.925,67.1) ; v1(27.925,67.1) v1(27.925,67.75) ; v1(27.925,67.1) U5.F6@28.4,67.1 ; v1(27.925,67.75) v1(27.925,68.4) ; v1(27.925,67.75) U5.F7@28.4,67.75 ; v1(27.925,68.4) 27.925,69.05 ; v1(27.925,68.4) U5.F8@28.4,68.4 ; 27.925,69.05 U5.F9@28.4,69.05 ; v1(28.4,66.625) v1(29.05,66.625) ; v1(28.4,66.625) U5.F6@28.4,67.1 ; U5.F6@28.4,67.1 U5.F7@28.4,67.75 ; U5.F6@28.4,67.1 U5.G6@29.05,67.1 ; U5.F7@28.4,67.75 U5.G7@29.05,67.75 ; U5.F7@28.4,67.75 U5.F8@28.4,68.4 ; U5.F8@28.4,68.4 U5.G8@29.05,68.4 ; U5.F8@28.4,68.4 U5.F9@28.4,69.05 ; U5.F9@28.4,69.05 U5.G9@29.05,69.05 ; U5.F9@28.4,69.05 U5.F10@28.4,69.7 U5.G10@29.05,69.7 ; v1(29.05,66.625) v1(29.7,66.625) ; v1(29.05,66.625) U5.G6@29.05,67.1 ; U5.G6@29.05,67.1 U5.G7@29.05,67.75 ; U5.G6@29.05,67.1 U5.H6@29.7,67.1 ; U5.G7@29.05,67.75 U5.H7@29.7,67.75 ; U5.G7@29.05,67.75 U5.G8@29.05,68.4 ; U5.G8@29.05,68.4 U5.H8@29.7,68.4 ; U5.G8@29.05,68.4 U5.G9@29.05,69.05 ; U5.G9@29.05,69.05 U5.H9@29.7,69.05 ; U5.G9@29.05,69.05 U5.G10@29.05,69.7 ; U5.G10@29.05,69.7 U5.H10@29.7,69.7 ; v1(29.05,70.525) v1(28.4,70.525) U5.F12@28.4,71 U5.G12@29.05,71 ; v1(29.05,70.525) v1(29.7,70.525) U5.H12@29.7,71 U5.G12@29.05,71 ; v1(29.05,70.525) U5.G12@29.05,71 ; v1(29.7,66.625) v1(30.35,66.625) ; v1(29.7,66.625) U5.H6@29.7,67.1 ; U5.H6@29.7,67.1 U5.H7@29.7,67.75 ; U5.H6@29.7,67.1 U5.J6@30.35,67.1 ; U5.H7@29.7,67.75 U5.J7@30.35,67.75 ; U5.H7@29.7,67.75 U5.H8@29.7,68.4 ; U5.H8@29.7,68.4 U5.J8@30.35,68.4 ; U5.H8@29.7,68.4 U5.H9@29.7,69.05 ; U5.H9@29.7,69.05 U5.J9@30.35,69.05 ; U5.H9@29.7,69.05 U5.H10@29.7,69.7 ; U5.H10@29.7,69.7 U5.J10@30.35,69.7 ; v1(30.35,66.625) v1(31,66.625) ; v1(30.35,66.625) U5.J6@30.35,67.1 ; U5.J6@30.35,67.1 U5.K6@31,67.1 ; U5.J6@30.35,67.1 U5.J7@30.35,67.75 ; U5.J7@30.35,67.75 U5.K7@31,67.75 ; U5.J7@30.35,67.75 U5.J8@30.35,68.4 ; U5.J8@30.35,68.4 U5.K8@31,68.4 ; U5.J8@30.35,68.4 U5.J9@30.35,69.05 ; U5.J9@30.35,69.05 U5.K9@31,69.05 ; U5.J9@30.35,69.05 U5.J10@30.35,69.7 ; U5.J10@30.35,69.7 U5.K10@31,69.7 ; v1(31,66.625) 31.35,66.625 ; v1(31,66.625) U5.K6@31,67.1 ; U5.K6@31,67.1 U5.K7@31,67.75 ; U5.K6@31,67.1 v1(31.475,67.1) ; U5.K7@31,67.75 U5.K8@31,68.4 ; U5.K7@31,67.75 v1(31.475,67.75) ; U5.K8@31,68.4 v1(31.475,68.4) ; U5.K8@31,68.4 U5.K9@31,69.05 ; U5.K9@31,69.05 v1(31.475,69.05) ; U5.K9@31,69.05 U5.K10@31,69.7 ; U5.K10@31,69.7 31.2,69.7 31.475,69.425 v1(31.475,69.05) ; 31.35,66.625 31.475,66.75 v1(31.475,67.1) ; v1(31.475,67.1) v1(31.475,67.75) ; v1(31.475,67.75) v1(31.475,68.4) ; v1(31.475,68.4) v1(31.475,69.05) ; v1(31.475,68.4) U5.M8@32.3,68.4 U5.M9@32.3,69.05 v1(31.475,69.05)
  Top Layer w0.25: U5.F2@28.4,64.5 U5.G2@29.05,64.5 ; U5.M1@32.3,63.85 32.3,63.65 32.625,63.325 v1(32.625,63.3) 32.95,63.625 U5.N1@32.95,63.85
  Top Layer w0.3: v1(10.825,61.275) U1.2@11.875,61.275 ; v1(10.825,64.525) U6.2@11.875,64.525 ; 13.64,81.92 13.67,81.89 ; U19.9@13.75,72.05 13.475,72.325 C30.1@13.475,73.8 R22.2@14.3,73.8 14.36,73.74 14.36,73.34 14.64,73.06 14.64,72.81 U19.8@14.65,72.8 ; R35.1@17,14.2 v1(17,14.85) ; CN3.B12@19.5,7.56 19.5,8.1 19.75,8.35 CN3.A1@19.75,9.125 ; CN3.A1@19.75,9.36 v2(19.75,10.125) ; C41.1@20.375,39.03 20.375,38.8 20.675,38.5 v1(21.425,38.5) ; v1(22.1,64.925) C21.2@22.725,64.925 ; v1(22.1,67.025) 22.141,67.025 22.214,67.099 22.62,67.099 22.725,67.204 C17.2@22.725,67.225 ; v1(22.1,68.7) C15.2@22.725,68.7 ; v1(22.1,69.925) C13.2@22.725,69.925 ; v1(22.5,14.35) U17.2@22.5,15.375 ; v1(24.3,61.425) C24.2@24.9,61.425 ; C6.2@24.375,75.35 24.5,75.475 v1(24.5,75.875) ; CN3.B1@25,7.56 25,8.2 25.25,8.45 CN3.A12@25.25,9.25 ; v1(25.125,74.45) C46.1@25.7,74.45 ; CN3.A12@25.25,9.36 v2(25.25,10.1) ; v1(25.35,20.225) C45.1@26,20.225 ; C55.1@25.66,28.24 25.745,28.325 v1(26.75,28.325) 26.75,27.75 C54.1@26.76,27.74 26.785,27.74 26.89,27.635 26.89,27.61 27.15,27.35 U13.18@29.1,27.35 ; v1(25.825,60.8) C22.2@25.825,61.425 ; R40.1@26.6,23.05 v1(27.35,23.05) ; v1(27.075,60.8) C23.2@27.075,61.425 ; v1(27.8,75.975) 27.8,75.45 C7.2@27.9,75.35 ; v1(28.28,62.87) v1(28.28,61.83) v1(28.28,60.48) 27.73,60.48 26.975,59.725 v1(26.975,59.325) ; v1(28.55,7) U14.2@28.55,7.625 ; X1.4@28.925,59.425 28.825,59.325 C33.1@27.8,59.325 v1(26.975,59.325) ; C8.2@29.025,75.35 29.125,75.45 v1(29.125,75.975) ; U13.31@29.1,20.85 30.05,20.85 30.35,20.55 v1(30.35,19.8) ; v1(29.75,63.075) 29.875,62.95 v1(29.875,61.475) 29.875,60.775 30.45,60.2 v1(31.325,60.2) v1(32.325,60.2) v1(32.325,58.825) 32.334,58.816 32.334,58.363 ; v1(30.025,6.85) C49.1@30.025,7.525 ; C37.1@30.025,45.375 30.1,45.45 U12.2@31.2,45.45 ; X1.2@30.275,58.375 30.175,58.275 v1(30.175,57.5) ; R5.2@30.35,75.35 v1(30.35,75.975) ; v1(30.925,60.8) C25.2@30.925,61.425 ; C4.1@31.325,75.35 v1(31.325,75.975) ; C32.1@31.425,58.45 C32.1@31.45,58.45 ; T1.2@31.675,7.225 v1(31.675,8.325) 32.48,8.325 32.675,8.52 R41.1@32.675,8.575 ; C59.1@31.925,35.065 31.19,35.065 31.18,35.075 ; X3.2@33.05,35.215 33.074,35.239 33.074,35.864 33.37,36.16 33.395,36.16 33.5,36.265 C56.1@33.5,36.29 33.44,36.35 33.44,36.985 ; 33.475,73.5 33.55,73.575 C9.2@33.55,74.15 v1(34.175,74.15) ; v1(34.175,60.8) C26.2@34.175,61.425 ; v1(35.425,60.8) C27.2@35.425,61.425 ; R16.2@36.675,64.45 v1(37.3,64.45) ; C18.2@36.675,67.95 36.8,68.075 v1(37.25,68.075) ; C16.2@36.675,69.225 v1(37.3,69.225) ; C14.2@36.675,70.525 v1(37.3,70.525) ; C12.1@36.675,71.425 v1(37.3,71.425) ; C5.1@37.702,78.895 37.817,78.78 U4.2@37.817,77.37 ; 38.25,16.9 U13.47@38.25,18.2 ; R12.2@38.35,66.7 v1(38.35,67.325) ; C58.1@39.015,36.225 39.015,36.93 39.05,36.965 ; C57.1@39.815,36.225 v1(39.815,36.965) ; v1@39.825,36.975 v1(39.815,36.965) ; C42.1@40.775,15.55 v1@41.385,15.55 ; U13.63@40.9,27.35 v1(42.075,27.35) ; v1(42.475,0.698) 42.516,0.698 42.664,0.55 45.845,0.55 v1(46.185,0.89) ; C52.1@44.25,28.25 v1(44.85,28.25) ; v1@44.65,72.475 44.65,74.075 44.9,74.325 CN1.B1@44.9,74.95 ; R31.1@44.825,25.65 v1(45.525,25.65) ; C47.1@44.825,27 v1(45.525,27) ; Q1.2@47.975,46.2 48.164,46.2 48.514,46.55 v1(48.514,47.31) ; U10.2@49.395,51.69 49.395,52.233 v1(49.4,52.238) ; R28.1@49.675,45.7 49.73,45.7 49.9,45.87 v1(49.9,46.6) ; v2@50.15,72.475 CN1.A1@50.15,73.25 ; CN1.A1@50.15,73.375 50.15,73.538 50.143,73.545 50.143,74.008 50.4,74.265 CN1.B12@50.4,74.95 ; C34.1@50.275,51.95 v1(50.275,52.55) ; v1(52.1,71.15) C2.2@52.825,71.15 52.85,71.15 52.955,71.045 52.955,71.02 53.175,70.8 U3.2@54.025,70.8 ; LD7.3@57.42,79.465 v1(58.48,79.465) v1@58.48,80.05 ; LD7.3@57.42,80.64 v1(58.48,80.64) v1@58.48,80.05 ; LD7.3@57.425,80.05 v1@58.48,80.05 ; v1(58.485,80.05) v1@58.48,80.05 ; LD1.3@62.47,80.04 v1@63.56,80.04 ; LD1.3@62.5,79.45 v1(63.56,79.45) v1@63.56,80.04 ; LD1.3@62.5,80.625 v1(63.56,80.625) v1@63.56,80.04 ; v1(63.565,80.04) v1@63.56,80.04 ; v1(26.975,59.325) v1(26.975,57.5) v1(28.5,57.5) v1(30.175,57.5) ; v1(30.175,57.5) v1(31.6,57.5) ; 31.18,35.075 31.18,36.38 v1(31.95,37.15) v1(34.45,37.15) 34.479,37.121 34.754,37.121 35.35,36.525 v1(35.35,35.6) v1(35.35,33.275) 34.475,32.4 v1(34.025,32.4) 32.7,32.4 31.75,33.35 v1(31.6,33.35) 31.18,33.77 31.18,35.075 ; C32.1@31.45,58.45 32.246,58.45 32.334,58.363 ; C32.1@31.45,58.45 31.555,58.345 31.555,58.32 31.6,58.275 v1(31.6,57.5) ; v1(31.6,57.5) 31.629,57.529 32.028,57.529 32.296,57.797 32.296,57.871 v1(32.325,57.9) 32.334,57.909 32.334,58.363 ; 39.05,36.965 v1(39.815,36.965) ; 39.05,36.965 37.615,36.965 v1(37.125,36.475) v1(37.125,33.95) 37.125,33.325 37.401,33.049 37.56,32.89 40.89,32.89 v1(41.7,33.7) v1(41.7,36.075) 41.7,36.625 41.524,36.801 41.36,36.965 v1(39.815,36.965)
  Top Layer w0.5: C31.1@43.575,64.6 43.575,64.475 43.645,64.405 43.737,64.405 44.03,64.112 U7.2@44.03,62.85
  Top Layer w0.6: v1(0.773,48.6) v1(0.773,47.1) v1(0.773,43.825) v1(0.773,42.325) v1(0.773,39.05) v1(0.773,37.55) v1(0.773,34.275) v1(0.773,32.775) v1(0.773,29.675) v1(0.773,28.175) v1(0.773,24.85) v1(0.773,23.35) v1(0.773,20) v1(0.773,18.5) v1(0.773,15.225) v1(0.773,13.725) v1(0.773,10.45) v1(0.773,8.95) v1(0.773,5.625) 0.773,4.224 0.777,4.22 ccw(c2.22,4.22) v1@2.22,2.777 ; v1@0.777,48.6 v1(0.777,78.925) 0.777,80.315 cw(c2.252,80.315) v1(2.252,81.79) 13.67,81.79 67.502,81.79 cw(c67.502,79.997) 69.295,79.997 69.295,4.34 cw(c67.655,4.34) 67.655,2.7 47.995,2.7 v1(47.09,1.795) v1(46.185,0.89) ; v1(2.225,2.802) v1(6.9,2.802) v1(8.575,2.802) v1(10.075,2.802) 11.698,2.802 v1(13.8,0.7) v1@42.473,0.7
  Signal Layer 1 w0.3: 13.64,81.92 13.67,81.89 ; 42.72,0.7 42.82,0.7 42.97,0.55 45.845,0.55 v1(46.185,0.89)
  Signal Layer 1 w0.6: 13.67,81.8 13.67,81.79 ; 42.72,0.7 13.79,0.7 v1(12.85,1.64) 11.713,2.777 2.22,2.777 cw(c2.22,4.22) 0.777,4.22 v1(0.777,78.925) 0.777,80.315 cw(c2.252,80.315) v1(2.252,81.79) 13.67,81.79 ; v1(46.185,0.89) v1(47.09,1.795) 47.995,2.7 67.655,2.7 ccw(c67.655,4.34) 69.295,4.34 69.295,79.997 ccw(c67.502,79.997) 67.502,81.79 13.67,81.79
  Signal Layer 2 w0.3: v1(42.475,0.698) 42.516,0.698 42.664,0.55 45.845,0.55 v1(46.185,0.89)
  Signal Layer 2 w0.6: v1(0.773,43.825) v1(0.773,42.325) v1(0.773,39.05) v1(0.773,37.55) v1(0.773,34.275) v1(0.773,32.775) v1(0.773,29.675) v1(0.773,28.175) v1(0.773,24.85) v1(0.773,23.35) v1(0.773,20) v1(0.773,18.5) v1(0.773,15.225) v1(0.773,13.725) v1(0.773,10.45) v1(0.773,8.95) v1(0.773,5.625) 0.773,4.224 0.777,4.22 ccw(c2.22,4.22) v1@2.22,2.777 ; v1@0.777,43.825 v1(0.777,78.925) 0.777,80.315 cw(c2.252,80.315) v1(2.252,81.79) 13.67,81.79 67.502,81.79 cw(c67.502,79.997) 69.295,79.997 69.295,4.34 cw(c67.655,4.34) 67.655,2.7 47.995,2.7 v1(47.09,1.795) v1(46.185,0.89) ; v1(2.225,2.802) v1(6.9,2.802) v1(8.575,2.802) v1(10.075,2.802) 11.698,2.802 v1(13.8,0.7) v1@42.473,0.7
  Bottom Layer w0.3: 13.64,81.92 13.67,81.89 ; v1(30.075,36.225) 30.075,35.375 SB11.1@30.375,35.075 ; v1@42.473,0.7 42.514,0.7 42.664,0.55 45.845,0.55 v1(46.185,0.89)
  Bottom Layer w0.6: v1(0.775,40.7) v1(0.775,35.925) v1(0.775,31.325) v1(0.775,26.5) v1(0.775,21.65) v1(0.775,16.875) v1(0.775,12.1) v1(0.775,7.275) 0.775,4.222 0.777,4.22 ccw(c2.22,4.22) v1@2.22,2.777 ; v1@0.777,40.7 v1(0.777,78.925) 0.777,80.315 cw(c2.252,80.315) v1(2.252,81.79) 13.67,81.79 67.502,81.79 cw(c67.502,79.997) 69.295,79.997 v1@69.295,42.3 ; v1(2.225,2.802) v1(6.9,2.802) v1(8.575,2.802) v1(10.075,2.802) 11.698,2.802 v1(13.8,0.7) v1@42.473,0.7 ; v1(46.185,0.89) v1(47.09,1.795) 47.995,2.7 67.655,2.7 ccw(c67.655,4.34) 69.295,4.34 69.296,4.341 v1(69.296,5.6) v1(69.296,8.925) v1(69.296,10.425) v1(69.296,13.7) v1(69.296,15.2) v1(69.296,18.475) v1(69.296,19.975) v1(69.296,23.325) v1(69.296,24.825) v1(69.296,28.15) v1(69.296,29.65) v1(69.296,32.75) v1(69.296,34.25) v1(69.296,37.525) v1(69.296,39.025) v1(69.296,42.3)
  other v1: 15.45,0.698 16.95,0.698 18.625,0.698 20.275,0.696 21.775,0.696 23.3,0.698 24.95,0.696 28.075,0.698 29.725,0.696 31.225,0.696 32.875,0.698 34.525,0.696 36.025,0.696 37.65,0.698 39.3,0.696 40.8,0.696 48,2.7 49.65,2.698 51.15,2.698 52.825,2.698 54.475,2.696 55.975,2.696 57.5,2.698 59.15,2.696 60.65,2.696 62.275,2.698 63.925,2.696 65.425,2.696 67.075,2.698 3.75,2.804 5.25,2.804 11.725,2.8 68.75,3.1 1.2,3.2 28.3,3.425 69.296,4.1 0.773,4.125 27.825,5.85 69.298,7.25 47.7,9.77 28.125,11.175 25.325,11.95 69.298,12.075 26.725,12.7 20.65,14.225 25.85,14.875 49.475,14.95 43.375,15.425 41.415,15.538 17.65,16.725 69.298,16.85 19.425,21.05 69.298,21.625 22.85,25.85 69.298,26.475 31.275,26.925 49.05,27.625 69.298,31.3 47.875,32.625 39.5,32.9 69.298,35.9 44.2,36.875 69.298,40.675 8.675,40.725 29.75,41.475 51.55,42.85 45.825,43.75 39.975,43.8 69.296,43.8 31.88,44.435 33.13,44.435 11.25,44.55 30.03,44.685 8.95,44.825 32.5,45.45 69.298,45.45 0.775,45.475 12.25,45.8 36.035,46.095 37.15,46.3 43.825,46.35 17.45,46.5 31.88,46.485 33.13,46.485 45.575,46.55 41.425,46.7 14.35,47.025 69.296,47.075 38.08,47.11 51.825,47.2 18.3,47.225 19.275,47.325 17.075,47.35 35.725,47.45 32.23,47.71 9,47.95 22.575,48.375 26.325,48.4 69.296,48.575 12.95,49.55 69.298,50.225 0.775,50.25 18.2,50.525 51.825,50.625 55.475,50.825 7.875,51.15 61.15,51.8 69.296,51.9 0.773,51.925 3.325,52.775 13.4,52.85 8.65,52.875 66.8,53.2 63.45,53.225 69.296,53.4 0.773,53.425 6.3,54.075 61.825,54.95 69.298,55.05 0.775,55.075 4.025,55.575 8.675,55.725 63.275,56.475 69.296,56.675 0.773,56.7 55.425,56.95 11.175,58.025 7.25,58.05 69.296,58.175 0.773,58.2 3.125,58.2 34.3,58.2 24.025,58.475 19.575,58.55 42.275,58.7 62.55,59.25 38.725,59.75 69.298,59.825 0.775,59.85 40.8,59.95 66.775,60.1 69.296,61.475 0.773,61.5 20.2,61.95 38.775,62.875 69.296,62.975 0.773,63 41.775,63.1 20.625,63.45 2.325,63.75 62.625,63.925 69.298,64.625 0.775,64.65 2.65,64.65 41.275,65.5 43.575,65.525 63.75,65.575 2.65,65.925 69.296,66.25 0.773,66.275 66.65,66.75 69.296,67.75 0.773,67.775 53.325,69.025 13.225,69.25 69.298,69.4 0.775,69.425 16.025,69.9 18.05,69.9 11.125,70.5 9.1,70.9 69.296,70.925 0.773,70.95 67.425,72.3 63.15,72.425 69.296,72.425 0.773,72.45 44.65,72.525 5.3,73.2 8.575,73.375 10.4,73.55 36,73.625 2.85,74.05 69.298,74.075 0.775,74.1 13.475,74.55 14.3,74.625 63.875,74.95 44.15,75.05 7.625,75.175 69.298,75.75 0.775,75.775 12.025,75.8 19.4,75.8 32.65,76 41.225,76.45 15.425,77.175 59.275,77.225 69.298,77.25 0.775,77.275 9.7,77.825 64.45,77.85 15.4,78.025 17.3,78.05 7.625,78.6 36.875,78.9 69.3,78.9 21.5,79.15 40.85,79.6 20.7,80.375 52.15,80.4 69.3,80.4 29.5,80.475 0.8,80.7 68.7,81.3 1.275,81.45 3.65,81.8 5.3,81.798 6.8,81.798 8.475,81.798 10.125,81.796 11.625,81.796 13.15,81.798 14.8,81.796 16.3,81.796 17.925,81.798 19.575,81.796 21.075,81.796 22.725,81.798 24.375,81.796 25.875,81.796 27.5,81.798 29.15,81.796 30.65,81.796 32.325,81.798 33.975,81.796 35.475,81.796 37.1,81.798 40.25,81.796 41.875,81.798 43.525,81.796 45.025,81.796 46.65,81.798 48.3,81.796 49.8,81.796 51.25,81.798 52.9,81.796 54.4,81.796 56.075,81.798 57.725,81.796 59.225,81.796 60.925,81.798 62.575,81.796 64.075,81.796 65.7,81.798 67.35,81.796
  other v2: 50.15,72.525
GNDDetect: CN4.11 R15.2 | length 2.2
  Top Layer w0.3: R15.2@2.325,62.125 CN4.11@4.538,62.125
IOREF: CN6.2 CN7.12 SB39.2 | length 11.8
  Top Layer w0.5: CN7.12@5.79,38.06 CN6.2@10.87,38.06 16.035,38.06 v1(16.375,38.4)
  Bottom Layer w0.5: SB39.2@15.325,38.4 v1(16.375,38.4)
JTDI: R47.1 U5.L3 | length 18.3
  Top Layer w0.12: R47.1@16.225,63.225 19.725,63.225 19.95,63 24,63 24.325,63.325 24.325,63.5 25,64.175 26,64.175 26.145,64.32 26.145,65.276 26.364,65.495 27.226,65.495 27.405,65.674 27.405,66.002 27.528,66.125 31.125,66.125 31.325,65.925 31.325,65.475 U5.L3@31.65,65.15
MCO: C46.2 R4.2 SB27.1 TP13.1 | length 69.6